# Allegro board 600-INT0061-01_01.brd
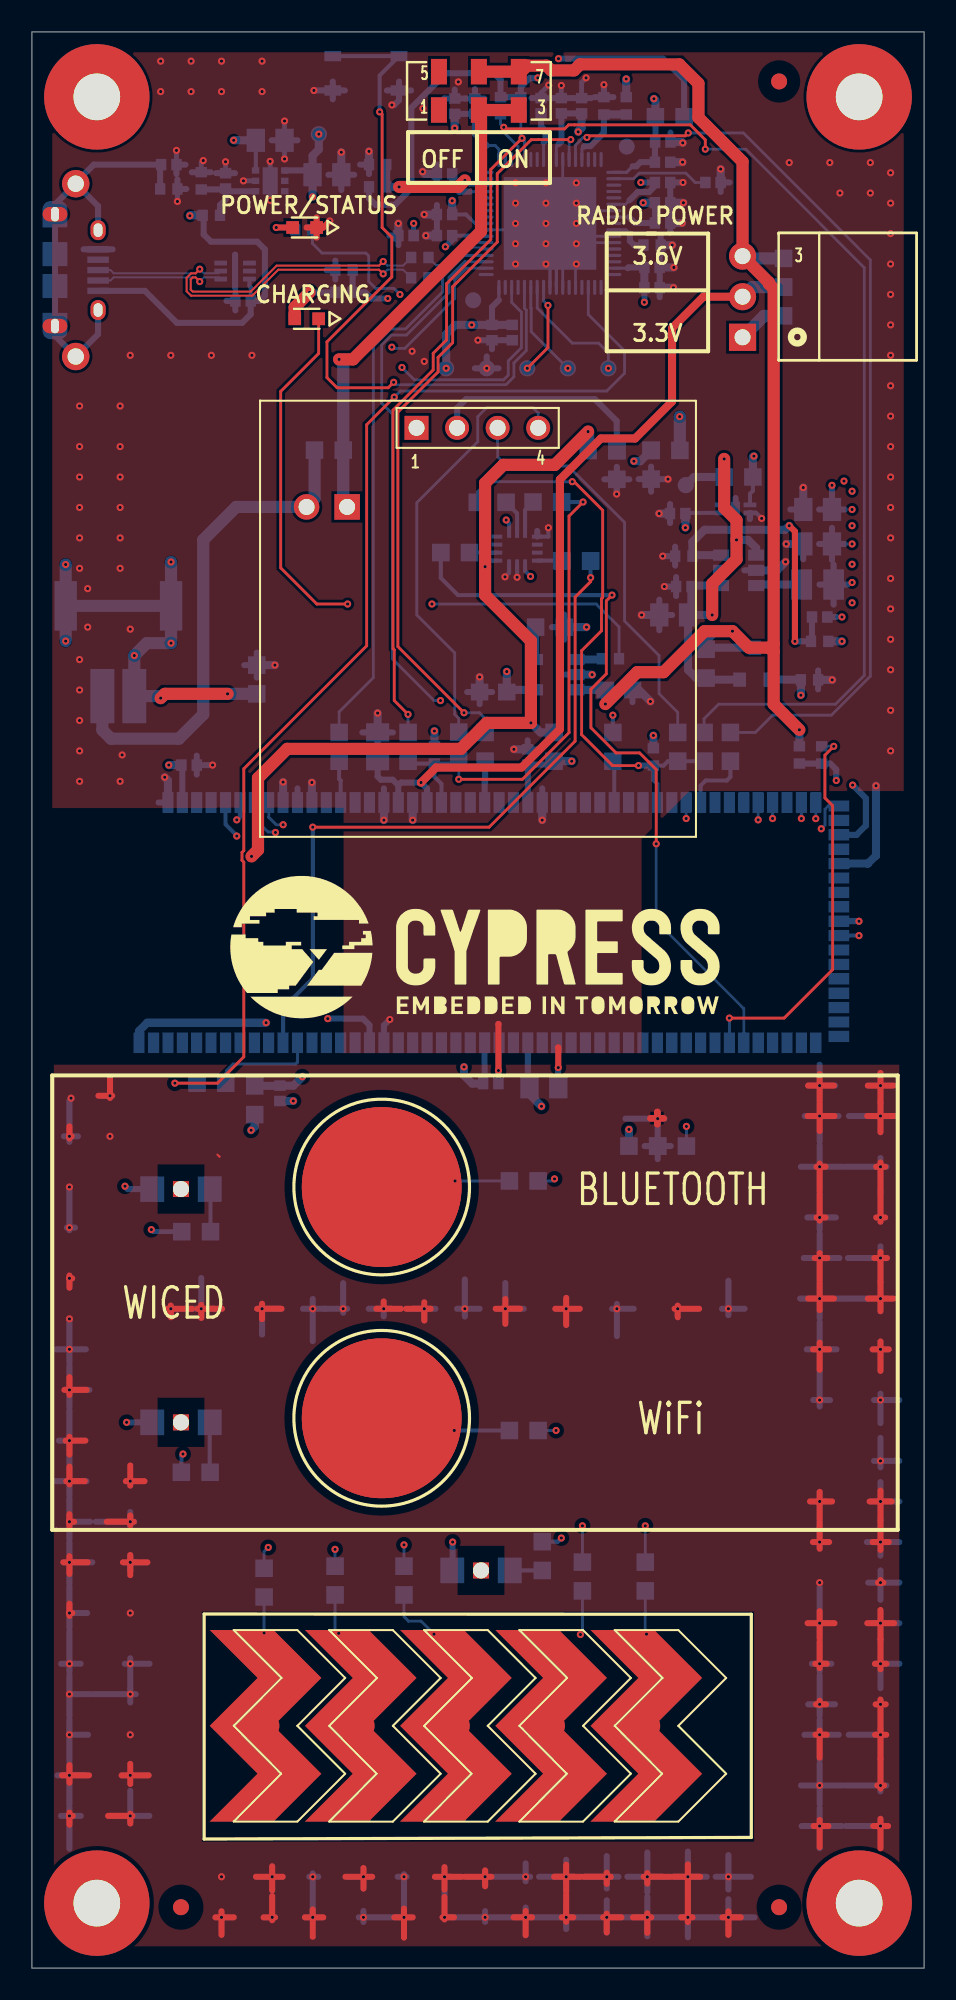
[diagram p0: board, top side]
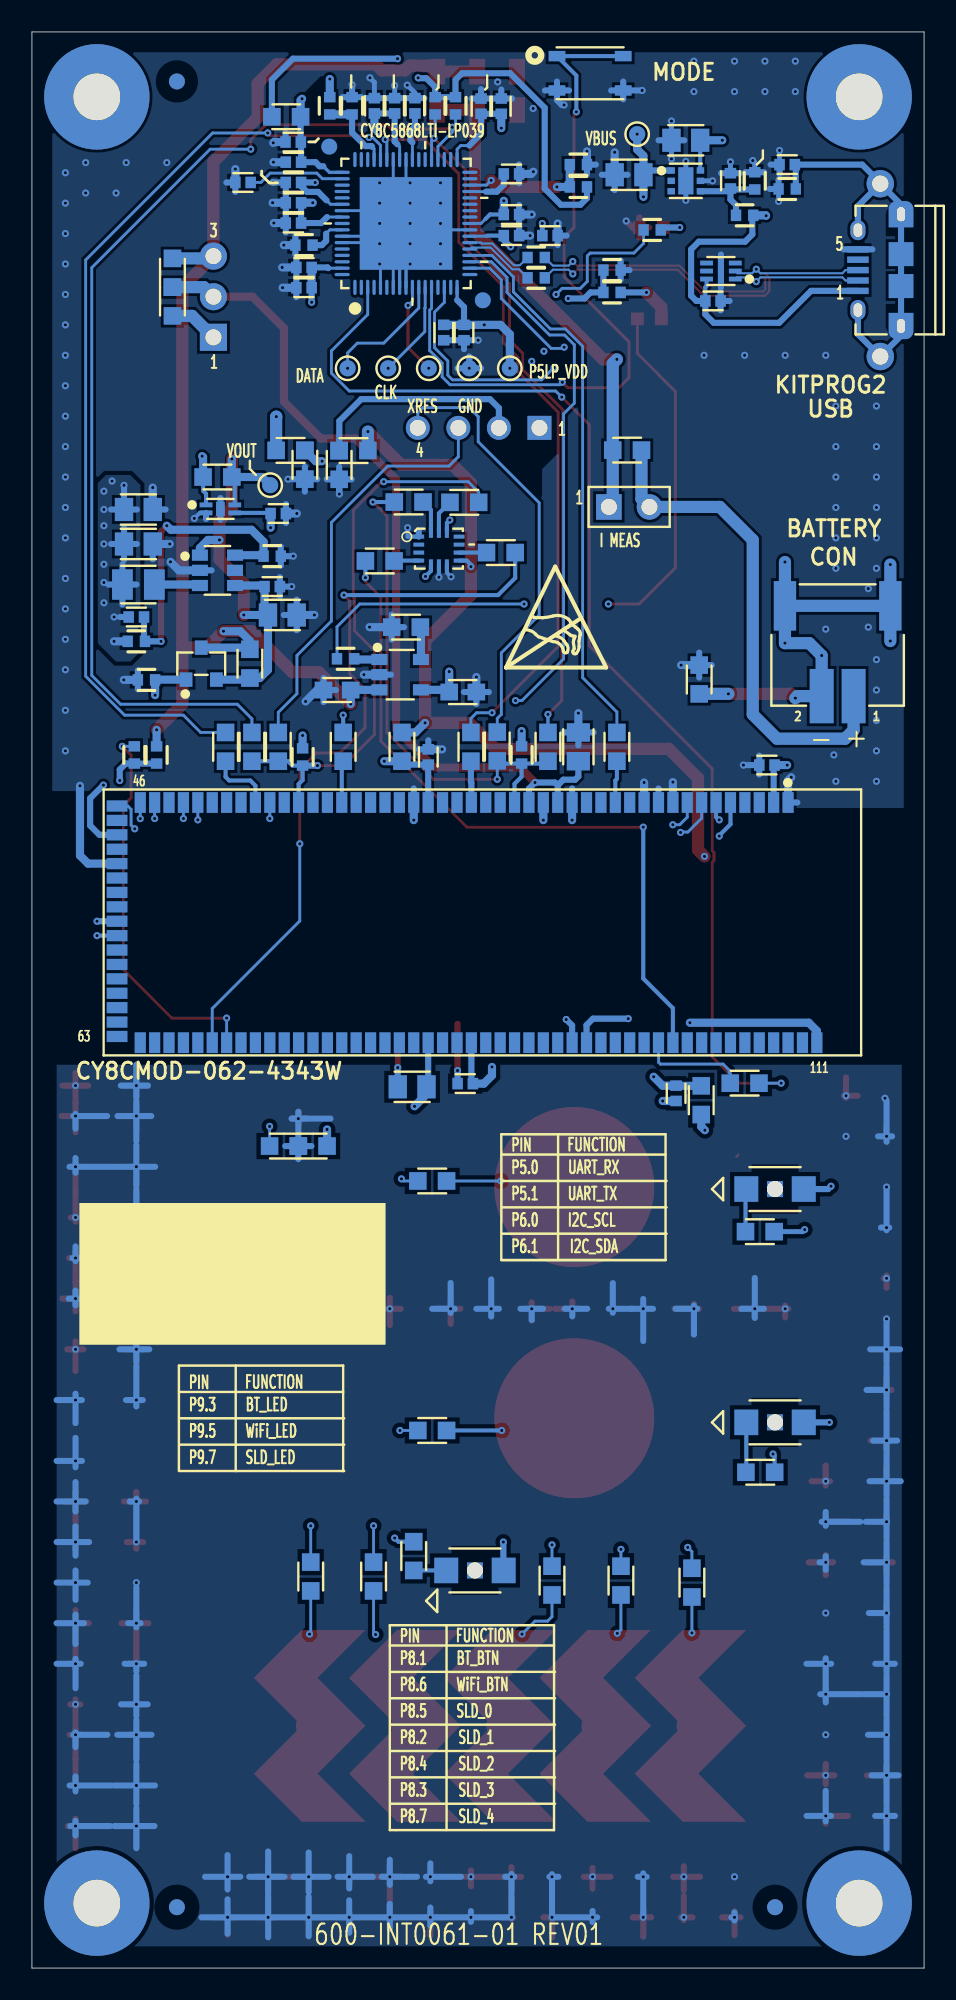
[diagram p1: board, bottom side, seen from below]

Outline 55.88 x 121.21 mm; copper layers: TOP, L02_GND, L03_SIG, BOTTOM. Coordinates in mm from the lower left corner of the outline.
Outline path: 0,121.21 0,0 55.88,0 55.88,121.21 0,121.21

## Design rules (mm)
net group DIFFPAIR0: nets KP_DM KP_DP
net group DP2: nets N17125157 N17125159
net group P6_VDD: nets P6_0 P6_1
net group P8_1: nets N19899805 P8_1
net group P8_6: nets N19899815 P8_6
net group VBUS_IN: nets N19836942 VBUS_IN
net group POWER_PH: nets P5LP_VCCD
net group PWR_PH: nets GND_EARTH1
net group VBUS: nets USB_V_SENSE
net group VTARG: nets I2C_SCL I2C_SDA VTARG_MEAS
nets with their own width: min track width 0.178; nets DISP_SCL DISP_SDA HATCH N17124951 N17125101 N17125106 N17125108 N19186096 N19253849
nets with their own width: min track width 0.381; nets DISP_GND DISP_VDD
nets with their own width: min track width 0.635; nets P5LP_VDD VBUS

## Placement (name value [footprint] x y rotation side)
C1  10nF  [CAPC1005_0402N]  8.57 112.9 0 bottom
C2  0.1uF  [CAPC1005_0402N]  13.22 104.37 180 bottom
C3  1.0 uF  [CAPC1005_0402N]  23.43 108.46 180 bottom
C4  0.1uF  [CAPC1005_0402N]  30.09 102.39 270 bottom
C5  1.0 uF  [CAPC1005_0402N]  25.84 108.46 180 bottom
C6  0.1uF  [CAPC1005_0402N]  34.43 116.59 90 bottom
C7  1.0 uF  [CAPC1005_0402N]  27.75 116.56 90 bottom
C8  0.1uF  [CAPC1005_0402N]  33.16 116.59 90 bottom
C9  1.0 uF  [CAPC1005_0402N]  26.48 116.56 90 bottom
C10  0.1uF  [CAPC1005_0402N]  28.82 102.39 270 bottom
C11  1.0 uF  [CAPC1005_0402N]  42.66 111.79 0 bottom
C12  1.0 uF  [CAPC1005_0402N]  25.84 112.32 180 bottom
C13  1.0 uF  [CAPC1005_0402N]  31.89 116.59 90 bottom
C14  1.0 uF  [CAPC1005_0402N]  39.5 111.79 0 bottom
C15  0.1uF  [CAPC1005_0402N]  25.84 109.78 180 bottom
C16  1.0 uF  [CAPC1005_0402N]  39.5 113.06 0 bottom
C17  0.1uF  [CAPC1005_0402N]  38.84 105.2 0 bottom
C18  1.0 uF  [CAPC1005_0402N]  39.5 110.52 0 bottom
C19  0.1uF  [CAPC1005_0402N]  38.84 106.47 0 bottom
C20  1.0 uF  [CAPC1005_0402N]  39.52 114.32 0 bottom
C21  0.1uF  [CAPC1005_0402N]  39.5 109.25 0 bottom
C22  0.1uF  [CAPC1005_0402N]  40.45 91.06 0 bottom
C23  4.7uF  [CAPC1608_0603M]  28.89 79.88 180 bottom
C24  22uF  [CAPC2012_0805N]  40.2 84.71 180 bottom
C25  22uF  [CAPC2012_0805N]  49.21 89.15 180 bottom
C26  0.1uF  [CAPC1005_0402N]  40.83 86.49 180 bottom
C27  10uF  [CAPC2012_0805N]  14.92 114.43 180 bottom
C28  22uF  [CAPC2012_0805N]  49.21 91.31 180 bottom
C29  22pF  [CAPC1005_0402N]  49.34 84.58 180 bottom
C30  10uF  [CAPC2012_0805N]  32.07 55.17 0 bottom
C31  1.0 uF  [CAPC1005_0402N]  9.84 75.31 0 bottom
C32  1.0 uF  [CAPC1005_0402N]  28.74 55.37 0 bottom
C33  1.0 uF  [CAPC1005_0402N]  31.05 75.82 90 bottom
C34  10uF  [CAPC2012_0805N]  21.65 76.45 90 bottom
C35  1.0 uF  [CAPC1005_0402N]  15.53 54.76 270 bottom
C36  10uF  [CAPC2012_0805N]  18.48 112.27 180 bottom
C37  0.1uF  [CAPC1005_0402N]  12.13 111.89 90 bottom
C38  4.7uF  [CAPC1608_0603M]  36.77 80.01 0 bottom
CAP_SH1  CAP_SHIELD  [CAP_SH1]  39.15 53.21 0 top
CSB1  CapSense  [CSB-10MM]  21.91 48.89 0 top
CSB2  CapSense  [CSB-10MM]  21.91 34.42 0 top
CSS1  CapSense Slider 5 Seg  [CSS5A-300MIL_4MMSHAPE]  26.55 15.16 0 top
J1  HDR2  [3M_961102-6404-AR]  19.74 91.47 180 bottom
J2  10118194-0001LF  [FCI_10118194-0001LF]  4.14 105 90 bottom
J3  620102131822  [WURTH_620102131822]  4.41 79.63 0 bottom
J4  TSW-103-08-F-S-RA  [HARWIN_M20-9960345]  44.51 102.09 90 top
J5  CON 4x1  [CTST254P1X04_W260]  24.09 96.42 0 top
JMP1  USB_Hold  [CON_RA_STIFF_850P]  2.74 100.89 90 top
L1  2.2uH  [INDC2016_0806M]  49.21 86.61 0 bottom
LED1  AMBER LED  [LEDC1608_0603N]  17.08 108.97 0 top
LED2  Red LED  [LED_APTR3216]  9.33 48.77 0 bottom
LED3  Red LED  [LED_APTR3216]  9.33 34.16 0 bottom
LED4  Red LED  [LED_APTR3216]  28.13 24.89 0 bottom
LED5  RED LED  [LEDC1608_0603N]  17.21 103.25 0 top
NOREF  -  [unnamed]  4.06 4.06 0 top
NOREF#2  -  [unnamed]  51.82 4.06 0 top
NOREF#3  -  [#2]  -90.61 -18.34 0 top
NOREF#4  -  [unnamed#2]  9.33 3.81 0 top
NOREF#5  -  [#2]  -108.9 -2.9 0 top
NOREF#6  -  [unnamed]  4.06 117.14 0 top
NOREF#7  -  [#2]  29.78 63.92 0 top
NOREF#8  -  [unnamed#2]  46.8 118.11 0 top
NOREF#9  -  [#2]  63.72 60.25 0 top
NOREF#10  -  [unnamed]  51.82 117.14 0 top
NOREF#11  -  [#2]  45.94 22.15 0 top
NOREF#12  -  [#2]  -365.8 -259 0 top
NOREF#13  -  [unnamed#2]  46.8 3.81 0 top
NOREF#14  -  [#2]  -59.47 -74.37 0 top
NOREF#15  -  [unnamed#2]  46.8 118.11 180 bottom
NOREF#16  -  [unnamed#2]  46.8 3.81 180 bottom
NOREF#17  -  [unnamed#2]  9.33 3.81 180 bottom
Q1  FET-MOS-P  [SOT23_G_S_D-DIODES]  45.28 81.66 180 bottom
R1  100K  [RESC1005_0402M]  8.57 111.38 0 bottom
R2  0ohm  [RESC1608_0603M]  39.95 115.9 0 bottom
R3  15K  [RESC1005_0402M]  19.55 104.9 0 bottom
R4  30K  [RESC1005_0402M]  19.55 106.3 0 bottom
R5  49.9K  [RESC1005_0402M]  37.22 116.59 270 bottom
R6  49.9K  [RESC1005_0402M]  35.83 116.59 270 bottom
R7  15K  [RESC1005_0402M]  21.65 111.51 0 bottom
R8  30K  [RESC1005_0402M]  21.65 112.9 0 bottom
R9  2.2K  [RESC1005_0402M]  17.03 108.81 180 bottom
R10  22E  [RESC1005_0402M]  24.3 105.82 0 bottom
R11  22E  [RESC1005_0402M]  24.3 107.09 0 bottom
R12  4.7K  [RESC1005_0402M]  30.62 116.59 270 bottom
R13  4.7K  [RESC1005_0402M]  29.35 116.59 270 bottom
R14  100K  [RESC1005_0402M]  38.84 107.86 180 bottom
R15  300K  [RESC1005_0402M]  48.07 75.95 270 bottom
R16  4.7K  [RESC1005_0402M]  25.21 75.95 90 bottom
R17  4.7K  [RESC1005_0402M]  38.93 75.82 90 bottom
R18  84.5K  [RESC1005_0402M]  40.83 88.39 180 bottom
R19  383K  [RESC1005_0402M]  49.34 83.06 0 bottom
R20  560ohm  [RESC1608_0603M]  30.81 49.28 180 bottom
R21  100K  [RESC1005_0402M]  49.47 75.95 90 bottom
R22  560ohm  [RESC1608_0603M]  14.54 24.13 270 bottom
R23  560ohm  [RESC1608_0603M]  18.99 24.26 270 bottom
R24  560ohm  [RESC1608_0603M]  23.3 24.26 270 bottom
R25  560ohm  [RESC1608_0603M]  34.48 24.51 270 bottom
R26  560ohm  [RESC1608_0603M]  38.42 24.51 270 bottom
R27  560ohm  [RESC1608_0603M]  30.81 33.66 180 bottom
R28  0ohm  [RESC1608_0603M]  11.24 55.4 180 bottom
R29  0ohm  [RESC1608_0603M]  43.75 76.45 90 bottom
R30  0ohm  [RESC1608_0603M]  28.38 76.45 90 bottom
R31  0ohm  [RESC1608_0603M]  40.09 51.46 180 bottom
R32  0ohm  [RESC1608_0603M]  32.7 76.45 270 bottom
R33  0ohm  [RESC1608_0603M]  44.26 93.34 180 bottom
R34  0ohm  [RESC1608_0603M]  36.39 76.45 90 bottom
R35  0ohm  [RESC1608_0603M]  19.24 76.45 90 bottom
R36  0ohm  [RESC1608_0603M]  38.29 51.46 180 bottom
R37  0ohm  [RESC1608_0603M]  28.8 91.76 0 bottom
R38  15K  [RESC1005_0402M]  11.24 109.73 0 bottom
R39  15K  [RESC1005_0402M]  10.6 111.89 270 bottom
R40  0ohm  [RESC1608_0603M]  23.56 76.45 90 bottom
R41  0ohm  [RESC1608_0603M]  42.1 76.45 90 bottom
R42  0ohm  [RESC1608_0603M]  13.96 54.33 90 bottom
R43  0ohm  [RESC1608_0603M]  47.08 106.13 90 bottom
R44  0ohm  [RESC1608_0603M]  47.08 104.33 90 bottom
R45  0ohm  [RESC1608_0603M]  42.23 81.66 270 bottom
R46  100K  [RESC1005_0402M]  48.7 80.64 180 bottom
R47  0ohm  [RESC1608_0603M]  32.28 91.78 180 bottom
R48  0ohm  [RESC1608_0603M]  34.09 88.09 180 bottom
R49  470ohm  [RESC1608_0603M]  10.29 46.1 0 bottom
R50  470ohm  [RESC1608_0603M]  10.26 31.04 0 bottom
R51  470ohm  [RESC1608_0603M]  31.97 25.79 270 bottom
R52  0ohm  [RESC1608_0603M]  18.6 95.03 180 bottom
R53  0ohm  [RESC1608_0603M]  26.51 88.62 0 bottom
R54  0ohm  [RESC1608_0603M]  14.08 80.67 270 bottom
R55  0ohm  [RESC1608_0603M]  39.68 95.01 180 bottom
R56  0ohm  [RESC1608_0603M]  36.64 94.1 90 bottom
R57  0ohm  [RESC1608_0603M]  38.78 94.11 90 bottom
R58  0ohm  [RESC1608_0603M]  35.74 95 0 bottom
R59  0ohm  [RESC1608_0603M]  40.45 76.45 90 bottom
R60  0ohm  [RESC1608_0603M]  26.73 76.47 90 bottom
R61  4.02K  [RESC1608_0603M]  32.45 83.95 180 bottom
R62  2.2K  [RESC1005_0402M]  36.23 81.97 180 bottom
SW1  JS202011JCQN  [SW_JS202011JCQN]  27.99 117.52 0 top
SW2  SKRPACE010  [SW_SKRPACE010]  20.92 118.62 180 bottom
TP1  TP_SMD  [TP102C]  25.95 100.15 180 bottom
TP2  TP_SMD  [TP102C]  28.49 100.15 180 bottom
TP3  TP_SMD  [TP102C]  31.03 100.15 180 bottom
TP4  TP_SMD  [TP102C]  33.57 100.15 180 bottom
TP5  TP_SMD  [TP102C]  36.11 100.15 180 bottom
TP6  TP_SMD  [TP102C]  17.97 114.81 180 bottom
TP7  TP_SMD  [TP102C]  40.96 92.84 180 bottom
U1  CY8C5868LTI-LP039  [QFN40P800X800X100-69M]  32.45 109.22 90 bottom
U2  PUSBM12VX4-TL,115  [SON50P160X160X50-7M]  12.72 106.24 0 bottom
U3  NCP380HMU05AATBG  [DFN200X200X55-7N]  14.92 111.89 180 bottom
U4  SiP32408  [TDFN50P160X120X60-5M]  44.07 91.35 180 bottom
U5  AP3419KTTR-G1  [SOT95P280X100-6N]  44.26 87.5 180 bottom
U6  BMI160  [BOSCH_BMI160]  30.39 88.86 180 bottom
U7  CY8CMOD-062-4343W  [MOD-CY8C062-43012]  27.52 65.46 180 bottom
U8  MCP73831T-2ATI/OT  [SOT23-5_1_2_3_4_5]  32.82 80.97 180 bottom

## Library data of the parts
C1 C23-C30 C34 C36 C38 = CAP-NP
C2 C22 C37 = CAPACITOR NON-POL
C3 C5 C7 C9 C11-C14 C16 C18 C20 C31-C33 C35 = CAPACITOR NON-POL: signal model: DEFAULT_CAPACITOR_1e+06pF_2_1
C4 C6 C8 C10 C15 C17 C19 C21 = CAPACITOR NON-POL: signal model: DEFAULT_CAPACITOR_100000pF_2_1
CAP_SH1 = CAP_SHIELD: User Part Number: Part No
CSB1 CSB2 = CapSense Button Circle Solid
CSS1 = CapSense Slider 5 Seg EXTEND_1
J1 = HEADER 2_0
J2 = USB MICRO R/A DIP_1
J3 = 620102131822
J4 = M20-9960345
J5 = CON 4x1: User Part Number: Part No
JMP1 = USB_JUMP_0
L1 = IND
LED1 = LED_2
LED2-LED4 = LED Green 0805_3
LED5 = LED_1
NOREF NOREF#2 NOREF#6 NOREF#10 = -: User Part Number: MTGHOLE_D320N
Q1 = FET-MOS-P
R1 R2 R9-R11 R14 R15 R18 R19 R21-R26 R28-R33 R36 R42-R45 R49-R52 R54-R58 R61 R62 = RESISTOR
R3 R7 R38 R39 = RESISTOR: signal model: DEFAULT_RESISTOR_15000OHM_2_1
R4 R8 = RESISTOR: signal model: DEFAULT_RESISTOR_30000OHM_2_1
R5 R6 R46 = RES
R12 R13 R16 R17 = RESISTOR: signal model: DEFAULT_RESISTOR_4700OHM_2_1
R20 R27 = 330 ohm 5% 0805_0: signal model: DEFAULT_RESISTOR_820OHM_2_1
R34 R35 R37 R40 R41 R47 R48 R53 R59 R60 = 330 ohm 5% 0805_0
SW1 = SW_DPDT_JS202011CQN_1
SW2 = SW PUSH NO 4-PIN
TP1-TP7 = TEST_POINT
U1 = CY8C38***-QFN68_0
U2 = PUSBM12VX4-TL,115_0
U3 = NCP380-D_2
U4 = SiP32408_0
U5 = AP3419KTTR-G1
U6 = BMI160
U7 = CY8CMOD-062-43012_3
U8 = MCP73831T-2ATI/OT

## Footprints (pads in the part's own frame, mm; a bottom-side part is the same pattern mirrored in y, then rotated)
3M_961102-6404-AR
  rect 1.6x1.6 hole 1: 1(0,0)
  round 1.6 hole 1: 2(2.54,0)
BOSCH_BMI160
  rect 0.675x0.25 smd: 1(-1.262,0.75) 2(-1.262,0.25) 3(-1.262,-0.25) 4(-1.262,-0.75) 8(1.262,-0.75) 9(1.262,-0.25) 10(1.262,0.25) 11(1.262,0.75)
  rect 0.25x0.675 smd: 5(-0.5,-1.012) 6(0,-1.012) 7(0.5,-1.012) 12(0.5,1.012) 13(0,1.012) 14(-0.5,1.012)
CAP_SH1
  rect 0.3x0.25 smd: 1(0,0)
CAPC1005_0402N
  rect 0.66x0.72 smd: 1(-0.48,0) 2(0.48,0)
CAPC1608_0603M
  rect 1.1x1.05 smd: 1(-0.85,0) 2(0.85,0)
CAPC2012_0805N
  rect 1.15x1.45 smd: 1(-0.9,0) 2(0.9,0)
CON_RA_STIFF_850P
  round 1.72 hole 1.02: 1(0,0) 2(10.82,0)
CSB-10MM
  custom 10x2.5 smd: 1(0,0)
CSS5A-300MIL_4MMSHAPE
  custom 7x11.999 smd: 1(11.925,0) 2(5.961,0) 3(0,0) 4(-5.961,0) 5(-11.925,0)
CTST254P1X04_W260
  rect 1.5x1.5 hole 1: 1(0,0)
  round 1.5 hole 1: 2(2.54,0) 3(5.08,0) 4(7.62,0)
DFN200X200X55-7N
  rect 0.47x0.4 smd: 1(-0.915,0.65) 2(-0.915,0) 3(-0.915,-0.65) 4(0.915,-0.65) 5(0.915,0) 6(0.915,0.65)
  rect 0.95x1.7 smd: H(0,0)
FCI_10118194-0001LF
  rect 0.4x1.35 smd: 1(0,0) 2(0.65,0) 3(1.3,0) 4(1.95,0) 5(2.6,0)
  oval 1.25x0.95 hole 0.85x0.55: SH1(-1.2,0) SH2(3.8,0)
  oval 0.9x1.55 hole 1.15x0.5: SH3(-2.2,-2.7) SH6(4.8,-2.7)
  rect 1.5x1.55 smd: SH4(0.3,-2.7) SH5(2.3,-2.7)
HARWIN_M20-9960345
  rect 1.7x1.7 hole 1: 1(0,0)
  round 1.7 hole 1: 2(2.54,0) 3(5.08,0)
INDC2016_0806M
  rect 1.3x1.9 smd: 1(-1,0) 2(1,0)
LED_APTR3216
  rect 1x1 hole 2.3x2.1 unplated: (0,0)
  rect 1.5x1.6 smd: A(-1.8,0) K(1.8,0)
LEDC1608_0603N
  rect 0.8x0.8 smd: A(-0.75,0) K(0.75,0)
MOD-CY8C062-43012
  rect 0.7x1.3 smd: 1(19.002,7.512) 2(18.1,7.512) 3(17.199,7.512) 4(16.297,7.512) 5(15.395,7.512) 6(14.493,7.512) 7(13.592,7.512) 8(12.69,7.512) 9(11.788,7.512) 10(10.887,7.512) 11(9.985,7.512) 12(9.083,7.512) 13(8.182,7.512) 14(7.28,7.512) 15(6.378,7.512) 16(5.476,7.512) 17(4.575,7.512) 18(3.673,7.512) 19(2.771,7.512) 20(1.87,7.512) 21(0.968,7.512) 22(0.066,7.512) 23(-0.835,7.512) 24(-1.737,7.512) 25(-2.639,7.512) 26(-3.541,7.512) 27(-4.442,7.512) 28(-5.344,7.512) 29(-6.246,7.512) 30(-7.147,7.512) 31(-8.049,7.512) 32(-8.951,7.512) 33(-9.852,7.512) 34(-10.754,7.512) 35(-11.656,7.512) 36(-12.558,7.512) 37(-13.459,7.512) 38(-14.361,7.512) 39(-15.263,7.512) 40(-16.164,7.512) 41(-17.066,7.512) 42(-17.968,7.512) 43(-18.869,7.512) 44(-19.771,7.512) 45(-20.673,7.512) 46(-21.575,7.512) 64(-21.575,-7.525) 65(-20.673,-7.525) 66(-19.771,-7.525) 67(-18.869,-7.525) 68(-17.968,-7.525) 69(-17.066,-7.525) 70(-16.164,-7.525) 71(-15.263,-7.525) 72(-14.361,-7.525) 73(-13.459,-7.525) 74(-12.558,-7.525) 75(-11.656,-7.525) 76(-10.754,-7.525) 77(-9.852,-7.525) 78(-8.951,-7.525) 79(-8.049,-7.525) 80(-7.147,-7.525) 81(-6.246,-7.525) 82(-5.344,-7.525) 83(-4.442,-7.525) 84(-3.541,-7.525) 85(-2.639,-7.525) 86(-1.737,-7.525) 87(-0.835,-7.525) 88(0.066,-7.525) 89(0.968,-7.525) 90(1.87,-7.525) 91(2.771,-7.525) 92(3.673,-7.525) 93(4.575,-7.525) 94(5.476,-7.525) 95(6.378,-7.525) 96(7.28,-7.525) 97(8.182,-7.525) 98(9.083,-7.525) 99(9.985,-7.525) 100(10.887,-7.525) 101(11.788,-7.525) 102(12.69,-7.525) 103(13.592,-7.525) 104(14.493,-7.525) 105(15.395,-7.525) 106(16.297,-7.525) 107(17.199,-7.525) 108(18.1,-7.525) 109(19.002,-7.525) 110(19.904,-7.525) 111(20.805,-7.525)
  rect 1.3x0.7 smd: 47(-23.027,7.293) 48(-23.027,6.391) 49(-23.027,5.489) 50(-23.027,4.588) 51(-23.027,3.686) 52(-23.027,2.784) 53(-23.027,1.883) 54(-23.027,0.981) 55(-23.027,0.079) 56(-23.027,-0.822) 57(-23.027,-1.724) 58(-23.027,-2.626) 59(-23.027,-3.528) 60(-23.027,-4.429) 61(-23.027,-5.331) 62(-23.027,-6.233) 63(-23.027,-7.134)
QFN40P800X800X100-69M
  round 1 smd: (-4.809,-4.809) (4.809,4.809)
  oval 0.95x0.2 smd: 1(-4,3.2) 2(-4,2.8) 3(-4,2.4) 4(-4,2) 5(-4,1.6) 6(-4,1.2) 7(-4,0.8) 8(-4,0.4) 9(-4,0) 10(-4,-0.4) 11(-4,-0.8) 12(-4,-1.2) 13(-4,-1.6) 14(-4,-2) 15(-4,-2.4) 16(-4,-2.8) 17(-4,-3.2) 35(4,-3.2) 36(4,-2.8) 37(4,-2.4) 38(4,-2) 39(4,-1.6) 40(4,-1.2) 41(4,-0.8) 42(4,-0.4) 43(4,0) 44(4,0.4) 45(4,0.8) 46(4,1.2) 47(4,1.6) 48(4,2) 49(4,2.4) 50(4,2.8) 51(4,3.2)
  oval 0.2x0.95 smd: 18(-3.2,-4) 19(-2.8,-4) 20(-2.4,-4) 21(-2,-4) 22(-1.6,-4) 23(-1.2,-4) 24(-0.8,-4) 25(-0.4,-4) 26(0,-4) 27(0.4,-4) 28(0.8,-4) 29(1.2,-4) 30(1.6,-4) 31(2,-4) 32(2.4,-4) 33(2.8,-4) 34(3.2,-4) 52(3.2,4) 53(2.8,4) 54(2.4,4) 55(2,4) 56(1.6,4) 57(1.2,4) 58(0.8,4) 59(0.4,4) 60(0,4) 61(-0.4,4) 62(-0.8,4) 63(-1.2,4) 64(-1.6,4) 65(-2,4) 66(-2.4,4) 67(-2.8,4) 68(-3.2,4)
  rect 5.8x5.8 smd: H(0,0)
RESC1005_0402M
  rect 0.65x0.72 smd: 1(-0.54,0) 2(0.54,0)
RESC1608_0603M
  rect 1.1x1.1 smd: 1(-0.9,0) 2(0.9,0)
SON50P160X160X50-7M
  rect 0.8x0.3 smd: 1(-0.9,0.5) 2(-0.9,0) 3(-0.9,-0.5) 4(0.9,-0.5) 5(0.9,0) 6(0.9,0.5)
  rect 0.3x1.6 smd: 7(0,0)
SOT23-5_1_2_3_4_5
  rect 1x0.7 smd: 1(-1.3,0.95) 2(-1.3,0) 3(-1.3,-0.95) 4(1.3,-0.95) 5(1.3,0.95)
SOT23_G_S_D-DIODES
  rect 0.8x0.899 smd: D(0,1) G(-0.95,-1) S(0.95,-1)
SOT95P280X100-6N
  rect 1x0.7 smd: 1(-1.1,0.95) 2(-1.1,0) 3(-1.1,-0.95) 4(1.1,-0.95) 5(1.1,0) 6(1.1,0.95)
SW_JS202011JCQN
  rect 1x1.6 smd: 1(-2.5,-1.2) 2(0,-1.2) 3(2.5,-1.2) 5(-2.5,1.2) 6(0,1.2) 7(2.5,1.2)
SW_SKRPACE010
  rect 1.05x0.65 smd: 1(-2.075,1.075) 2(2.075,1.075) 3(-2.075,-1.075) 4(2.075,-1.075)
TDFN50P160X120X60-5M
  rect 0.8x0.3 smd: 1(-0.9,0.25) 2(-0.9,-0.25) 3(0.9,-0.25) 4(0.9,0.25)
  rect 0.55x0.9 smd: H(0,0)
TP102C
  round 1.016 smd: 1(0,0)
unnamed
  round 6.604 hole 2.921 unplated: (0,0)
unnamed#2
  round 1 smd: (0,0)
WURTH_620102131822
  rect 1.5x3.4 smd: 1(0,0) 2(2,0)
  rect 1.4x3.1 smd: H1(-2.3,-5.65) H2(4.3,-5.65)

## Nets
GND: C1.2 C2.2 C3.2 C4.2 C5.2 C6.2 C7.2 C8.2 C9.2 C10.2 C11.2 C12.2 C13.2 C14.2 C15.2 C16.2 C17.2 C18.2 C19.2 C20.2 C21.2 C22.1 C23.2 C24.2 C25.2 C26.2 C27.1 C28.2 C30.2 C31.2 C32.2 C33.2 C34.2 C35.2 C36.1 C37.2 C38.2 J2.5(GND) LED1.K(CATHODE) R1.2 R4.1 R6.1 R8.1 R14.1 R18.2 R36.2 R39.1 R46.1 R54.1 R56.1 R57.1 R61.1 SW2.3 SW2.4 TP2.1 U1.5(VSSB) U1.7(VBOOST) U1.8(VBAT) U1.9(VSSD#9) U1.25(VSSD#25) U1.43(VSSA) U1.45(VSSD#45) U1.58(VSSD#58) U1.62(P2[0]) U1.63(P2[1]) U1.H(EPAD) U2.7 U3.5(GND) U3.H(PAD) U4.2(GND) U4.H(PAD) U5.2(GND) U6.1(SDO) U6.6(GNDIO) U6.7(GND) U7.1(GND1) U7.9(GND2) U7.10(GND3) U7.11(GND4) U7.16(GND5) U7.18(GND6) U7.27(GND7) U7.51(GND8) U7.94(GND9) U7.111(GND10) U8.2(VSS)
GND_EARTH1: C1.1 J2.SH1(S1) J2.SH2(S2) J2.SH3(S3) J2.SH4(S4) J2.SH5(S5) J2.SH6(S6) JMP1.1 JMP1.2 R1.1
VBAT: C38.1 J4.3 Q1.D R15.1 R43.2 R45.1 SW1.6 SW1.7 U8.3(VBAT)
VBAT_1DX: C34.1 J4.2 R43.1 R44.2 U7.17(VBAT1) U7.19(VBAT2)
VBAT_MINUS: J3.2 J3.H1(SH1) J3.H2(SH2) R54.2
VBAT_PLUS: J1.2 J3.1 R52.2
VBUS: C22.2 C23.1 C36.2 LED5.A(ANODE) Q1.G R2.2 R3.1 R33.1 R46.2 TP6.1 U3.1(OUT) U4.1(IN) U4.3(EN) U8.4(VDD)
VBUS_IN: C2.1 C27.2 J2.1(VBUS) R38.1 U2.6 U3.6(IN)
VDDA: U7.50(VDDA)
VDDD: U7.52(VDDD)
DISP_GND: J5.2 R56.2 R58.2
DISP_SCL: J5.3 R59.2
DISP_SDA: J5.4 R60.2
DISP_VDD: J5.1 R55.2 R57.2
HATCH: CAP_SH1.1(SH) R31.2 R36.1
I2C_SCL: R13.2 R41.2 U1.38(P12[0])
I2C_SDA: R12.2 R40.2 U1.39(P12[1])
KP_DM: J2.2(DM) R11.1 U2.1
KP_DP: J2.3(DP) R10.1 U2.2
P0_4: R48.1 U7.101(P0_4)
P5_0: R34.1 U7.32(P5_0)
P5_1: R35.1 U7.13(P5_1)
P5LP1_2: SW2.1 SW2.2 U1.13(P1[2])
P5LP1_4: R9.1 U1.15(P1[4])
P5LP2_2: U1.64(P2[2])
P5LP2_3: U1.65(P2[3])
P5LP2_4: U1.66(P2[4])
P5LP_SIO_VREF: R5.2 R6.2 U1.48(P0[0])
P5LP_VCCD: C14.1 C15.1 U1.26(VCCD#26) U1.57(VCCD#57)
P5LP_VDD: C3.1 C4.1 C5.1 C6.1 C7.1 C8.1 C9.1 C10.1 C16.1 C17.1 C18.1 C19.1 C20.1 C21.1 R2.1 TP1.1 U1.17(VDDIO1) U1.24(VDDD#24) U1.35(VDDIO3) U1.44(VDDA) U1.52(VDDIO) U1.59(VDDD#59) U1.67(VDDIO2)
P6_0: R17.1 R37.1 R41.1 R59.1 U7.35(P6_0)
P6_1: R16.1 R40.1 R47.1 R60.1 U7.20(P6_1)
P6_3: R31.1 U7.37(P6_3)
P6_6: R30.1 U7.23(P6_6)
P6_7: R29.1 U7.38(P6_7)
P6_VDD: C30.1 C31.1 C32.1 C33.1 LED2.A LED3.A LED4.A R16.2 R17.2 R32.2 U6.5(VDDIO) U6.12(CSB) U7.2(VDDIO2) U7.26(VDDUSB) U7.49(VCC_VAR) U7.84(VDDIO0) U7.87(VBACKUP)
P8_1: R20.1 U7.42(P8_1)
P8_2: R23.1 U7.8(P8_2)
P8_3: R25.1 U7.46(P8_3)
P8_4: R24.1 U7.45(P8_4)
P8_5: R22.1 U7.7(P8_5)
P8_6: R27.1 U7.43(P8_6)
P8_7: R26.1 U7.47(P8_7)
P9_3: R49.1 U7.6(P9_3)
P9_5: R50.1 U7.5(P9_5)
P9_7: R51.1 U7.56(P9_7)
P10_0: R15.2 R21.1 U7.55(P10_0)
P10_1: R21.2 U7.70(P10_1)
P10_2: R53.1 U7.69(P10_2)
RESET: R28.2 U1.3(P12[4])
SWDCLK: R29.2 U1.47(P12[3])
SWDIO: R30.2 U1.46(P12[2])
UART_RX: R35.2 U1.21(P12[7])
UART_TX: R34.2 U1.20(P12[6])
USB_V_SENSE: R3.2 R4.2 U1.19(P1[7])
VIO_1DX: C35.1 R42.2 U7.95(VDDIO_1LV)
VOUT: C24.1 C26.1 Q1.S R33.2 R45.2 TP7.1 U4.4(OUT) U5.1(EN) U5.4(VIN)
VREF: U7.57(VREF)
VTARG: C25.1 C28.1 C29.1 J4.1 L1.2 R5.1 R7.1 R12.1 R13.1 R19.2 R32.1 R42.1 R44.1 R55.1 R58.1 U6.8(VDD)
VTARG_MEAS: R7.2 R8.2 U1.32(P3[3])
XRES: R28.1 U7.100(XRES_L)
N17124951: R14.2 U1.61(P15[5])
N17125101: C12.1 U1.31(P3[2])
N17125106: C11.1 U1.53(P0[4])
N17125108: C13.1 U1.42(VCCA)
N17125157: R10.2 U1.22(P15[6] D+)
N17125159: R11.2 U1.23(P15[7] D-)
N19186096: LED1.A(ANODE) R9.2
N19253849: TP3.1 U1.10(X\R\E\S\)
N19328633: TP5.1 U1.11(P1[0])
N19328636: TP4.1 U1.12(P1[1])
N19347721: C29.2 R18.1 R19.1 U5.6(FB)
N19669338: L1.1 U5.3(LX)
N19836942: C37.1 R38.2 R39.2 U3.4(EN)
N19899464: CSS1.1 R26.2
N19899466: CSS1.2 R25.2
N19899468: CSS1.3 R24.2
N19899470: CSS1.4 R23.2
N19899472: CSS1.5 R22.2
N19899805: CSB1.1 R20.2
N19899815: CSB2.1 R27.2
N19906515: LED2.K R49.2
N19906555: LED3.K R50.2
N19906595: LED4.K R51.2
N19907528: J1.1 R52.1 SW1.2 SW1.3
N19917732: R61.2 U8.5(PROG)
N19917977: LED5.K(CATHODE) R62.1
N19917979: R62.2 U8.1(STAT)
N19933983: R37.2 U6.13(SCX)
N19933986: R47.2 U6.14(SDX)
N19934142: R48.2 U6.4(INT1)
N19935330: R53.2 U6.9(INT2)

Pads without a net: J2 4; SW1 1 5; U1 1 2 4 6 14 16 18 27 28 29 30 33 34 36 37 40 41 49 50 51 54 55 56 60 68; U2 3 4 5; U3 2 3; U5 5; U6 2 3 10 11; U7 3 4 12 14 15 21 22 24 25 28 29 30 31 33 34 36 39 40 41 44 48 53 54 58 59 60 61 62 63 64 65 66 67 68 71 72 73 74 75 76 77 78 79 80 81 82 83 85 86 88 89 90 91 92 93 96 97 98 99 102 103 104 105 106 107 108 109 110

## Via types
v1: diameter 0.45, hole 0.2, TOP to BOTTOM, 393 vias

## Routing (per net, layer and track width the routed paths; a pad name or vN(x,y) marks a point on that pad's centre or on a via; arc(x,y) is an arc through that point)
GND: length 208.6
  TOP w0.381: 17.83,108.33 LED1.K ; LED1.K 18.25,108.97 v1(18.66,109.37) ; LED1.K 17.2,108.97 ; LED1.K 17.83,109.6 ; 32.96,57.63 32.97,57.62 v1(32.97,56.37) ; 29.22,59.11 29.22,59.1 v1(29.22,56.19)
  L02_GND w0.381: 37.4,57.58 37.39,57.57 v1(37.39,52.5) ; 20.08,57.63 20.05,57.61
  L02_GND w0.508: v1(14.67,59.18) 15.81,60.32 19.75,60.32 ; v1(16.37,54.28) 17.92,54.28 20.05,56.41 20.05,57.61
  BOTTOM w0.178: v1(34.1,110.49) 34.57,110.02 U1.58 ; U1.43 32.45,112.01 v1(32.19,111.76) ; U1.63 34.17,108.02 v1(34.1,107.95) 33.25,107.1 U1.7 ; v1(30.29,109.22) 29.89,108.82 U1.25 ; v1(34.1,111.76) 34.07,111.73 33.57,111.73 33.25,112.05 U1.45 ; v1(34.1,106.68) 34.05,106.63 U1.5 ; U1.62 34.9,108.42 v1(34.1,109.22)
  BOTTOM w0.203: v1(32.19,107.95) 32.85,107.3 U1.8 ; U1.9 32.45,106.43 v1(32.19,106.68)
  BOTTOM w0.254: U4.2 45.36,91.1 v1(45.71,90.75) ; U6.6 v1(30.39,87.07) ; U6.7 29.89,87.36 v1(29.63,87.1) ; v1(32.35,90.17) 32.35,89.61 U6.1
  BOTTOM w0.305: v1(14.92,110.67) U3.H v1(14.92,113.11) ; C8.2 v1(33.16,117.86) ; v1(34.71,118.34) 34.43,118.06 C6.2 ; R1.2 v1(9.11,110.6) ; C13.2 31.89,117.4 v1(32.37,117.88) ; v1(10.73,113.16) 10.6,113.03 R39.1 ; U3.5 v1(13.25,111.89) ; v1(15.82,115.63) C27.1 v1(15.82,113.26) ; C1.2 v1(9.05,113.79) ; C37.2 v1(12.13,113.08)
  BOTTOM w0.381: 44.07,92.03 U4.H 44.07,90.67 ; v1(22.55,116.64) 22.69,116.64 22.99,116.94 SW2.3 ; 20.56,112.9 R8.1 21.11,112.31 ; v1(40.78,111.79) C14.2 39.98,111.19 ; 10.01,112.43 R39.1 11.2,112.43 ; 21.65,76.55 C34.2 ; C34.2 20.7,77.35 ; C34.2 22.61,77.35 ; 9.05,112.31 C1.2 9.61,112.9 ; 32.57,117.07 C8.2 33.75,117.07 ; 39.3,83.75 C24.2 ; C24.2 39.3,85.67 ; C24.2 40.1,84.71 ; v1(28.49,100.15) 29.23,100.15 ; v1(28.49,100.15) 28.49,100.89 ; v1(28.49,100.15) 27.75,100.15 ; 19.38,111.31 C36.1 ; C36.1 20.19,112.27 ; C36.1 18.57,112.27 ; 10.32,74.72 C31.2 ; C31.2 10.32,75.9 ; C31.2 v1(11.32,75.31) ; 5.05,107.6 J2.5 3.24,107.6 ; SW2.4 v1(17.66,117.55) ; SW2.4 18.84,116.99 ; SW2.4 18.84,118.1 ; SW2.4 19.6,117.55 ; 29.49,101.91 C4.2 ; 36.83,80.01 C38.2 ; C38.2 37.62,79.25 ; C38.2 37.62,80.77 ; 35.85,93.2 R56.1 ; R56.1 37.42,93.2 ; R56.1 36.64,93.98 ; R56.1 36.64,92.42 ; R56.1 v1(36.62,92.28) ; C10.2 29.41,101.91 ; C10.2 28.82,101.35 ; C10.2 v1(27.93,101.91) ; 49.24,81.24 R46.1 49.24,80.05 ; 39.98,111.11 C18.2 39.98,109.92 ; C23.2 28.82,79.88 ; C23.2 27.26,79.88 ; C23.2 28.04,79.13 ; C20.2 40,114.91 ; 33.38,80.97 U8.2 ; 22.39,108.46 C3.2 22.95,107.87 ; v1(22.42,59.39) 22.04,59.01 U7.94 ; 7.94,72.97 U7.1 ; 11.54,112.37 C37.2 12.72,112.37 ; 32.48,117.07 C13.2 31.3,117.07 ; R57.1 38.78,93.99 ; R57.1 38.78,92.43 ; R57.1 v1(39.84,93.21) ; R57.1 38,93.21 ; C30.2 v1(32.97,56.37) ; 13.3,81.57 R54.1 ; R54.1 14.08,80.79 ; R54.1 14.08,82.35 ; 39.38,108.45 R14.1 39.38,107.27 ; SW2.3 23.75,117.55 ; SW2.3 22.24,117.55 ; SW2.3 22.99,118.1 ; U6.1 31.65,89.97 ; 18.45,106.3 R4.1 ; R4.1 19.01,105.71 ; R4.1 19.01,106.89 ; R18.2 40.29,88.98 ; R18.2 v1(39.51,88.39) ; R18.2 40.29,87.8 ; 12.72,105.21 U2.7 12.72,107.27 ; R6.1 v1(35.83,117.91) ; R6.1 36.42,117.13 ; R6.1 35.23,117.13 ; C9.2 25.82,117.04 25.82,117.04 ; C9.2 26.48,117.6 ; C9.2 27.07,117.04 ; 39.97,91.65 C22.1 39.97,90.47 ; 31.64,76.3 C33.2 31.05,76.86 ; C26.2 40.35,87.08 ; C26.2 40.35,85.9 ; C26.2 v1(39.61,86.49) ; R61.1 33.35,84.73 ; R61.1 32.57,83.95 ; R61.1 33.35,83.17 ; 16.63,114.43 C27.1 15.02,114.43 ; 39.98,108.65 C21.2 39.98,109.84 ; 25.36,112.91 C12.2 25.36,111.73 ; 44.63,87.5 U5.2 ; 9.67,111.38 R1.2 9.11,111.97 ; 39.32,104.6 C17.2 39.32,105.79 ; C2.2 12.74,104.96 ; C2.2 12.18,104.37 ; C2.2 12.74,103.78 ; 25.36,110.37 C15.2 25.36,109.19 ; C7.2 27.75,117.63 ; C7.2 27.16,117.04 ; C7.2 28.34,117.04 ; 39.32,107.06 C19.2 39.32,105.87 ; C32.2 v1(29.22,56.19) ; 47.51,91.31 C28.2 ; U7.10 16.63,73.85 ; 48.31,88.2 C25.2 ; 33.84,117.07 C6.2 35.02,117.07 ; 43.14,111.19 C11.2 43.7,111.79 ; U7.27 31.96,73.85 ; 44.97,90.72 U4.2 ; C5.2 25.36,109.05 ; U7.16 22.04,73.85
  BOTTOM w0.508: C5.2 v1(24.68,108.46) ; U7.111 6.72,58.67 7.22,59.18 v1(14.67,59.18) ; C22.1 v1(39.29,91.06) ; U5.2 46.67,87.5 v1(47.21,88.04) ; C12.2 24.61,112.32 v1(24.47,112.46) ; v1(40.76,114.27) 40.71,114.32 C20.2 ; C16.2 v1(40.75,113.06) ; U7.11 v1(17.54,74.22) ; v1(38.74,79.3) 38.02,80.01 C38.2 ; C19.2 v1(40.21,106.47) ; C25.2 v1(47.25,89.15) ; C3.2 v1(22.95,109.22) ; C28.2 v1(48.31,92.68) ; C33.2 v1(30.19,76.3) ; U7.16 v1(22.04,71.87) ; U7.1 8.52,74.35 v1(8.32,74.55) ; C21.2 v1(40.73,109.25) ; U7.27 v1(31.96,71.87) ; U7.18 v1(23.85,71.87) ; C36.1 v1(19.38,113.68) ; C34.2 v1(21.65,78.56) ; R36.2 v1(37.39,52.5) ; R14.1 v1(40.1,107.86) ; C35.2 v1(16.37,54.28) ; R54.1 v1(15.22,81.57) ; C18.2 v1(40.81,110.52) ; U8.2 v1(35.09,80.97) ; v1(52.87,74.02) 52.87,69.65 52.36,69.14 U7.51 ; C23.2 v1(28.04,80.82) ; U7.9 v1(15.73,74.25) ; C11.2 v1(43.14,112.62) ; R61.1 v1(34.73,83.95) ; C17.2 v1(40.18,105.2) ; C15.2 v1(24.57,109.78) ; R8.1 v1(21.11,113.73) ; R46.1 v1(50.13,80.64) ; C24.2 v1(38.19,84.71)
  vias: v1(2.98,97.79) v1(2.98,95.25) v1(2.98,93.34) v1(2.98,91.44) v1(2.98,89.53) v1(2.98,87.63) v1(2.98,81.91) v1(2.98,80.01) v1(2.98,78.11) v1(2.98,76.2) v1(2.98,74.3) v1(3.49,86.36) v1(3.49,83.95) v1(5.52,97.79) v1(5.52,95.25) v1(5.52,93.34) v1(5.52,91.44) v1(5.52,89.53) v1(5.52,87.63) v1(5.52,74.3) v1(5.65,75.95) v1(6.16,100.97) v1(6.16,83.82) v1(8.06,119.38) v1(8.06,117.47) v1(8.7,100.97) v1(9.97,119.38) v1(9.97,117.47) v1(11.24,100.97) v1(11.87,119.38) v1(11.87,117.47) v1(13.78,100.97) v1(14.41,119.38) v1(14.41,117.47) v1(23.81,101.22) v1(24.49,116.42) v1(24.57,100.58) v1(26.71,118.08) v1(30.29,111.76) v1(30.29,110.49) v1(30.29,107.95) v1(30.29,106.68) v1(32.19,110.49) v1(32.19,109.22) v1(47.43,113.03) v1(49.97,113.03) v1(50.61,111.12) v1(52.51,113.03) v1(52.51,111.12) v1(53.78,112.39) v1(53.78,110.49) v1(53.78,108.58) v1(53.78,106.68) v1(53.78,104.78) v1(53.78,102.87) v1(53.78,100.97) v1(53.78,99.06) v1(53.78,97.16) v1(53.78,95.25) v1(53.78,93.34) v1(53.78,91.44) v1(53.78,89.53) v1(53.78,87) v1(53.78,85.09) v1(53.78,83.19) v1(53.78,81.28) v1(53.78,78.74) v1(53.78,76.2)
GND_EARTH1: length 26.3
  BOTTOM w0.381: J2.SH2 4.14,110.31 JMP1.2 ; R1.1 8.03,112.84 C1.1 3.87,112.9 2.74,111.77 JMP1.2 ; JMP1.2 1.44,110.41 J2.SH6 J2.SH5 J2.SH4 J2.SH3 1.44,102.19 JMP1.1 4.14,102.29 J2.SH1
VBAT: length 82.9
  TOP w0.762: 46.46,82.41 46.46,79.13 v1(48.07,77.52) ; 46.46,82.41 46.46,82.91 ; 46.46,82.41 46.21,82.66 ; v1(35.92,79.13) 37.91,81.13 39.56,81.13 42.13,83.69 v1(43.88,83.69) 44.91,82.66 46.21,82.66 ; 46.46,82.91 46.46,105.14 46.16,105.44 46.16,105.52 J4.3 44.51,113.08 41.74,115.85 41.74,117.98 40.55,119.18 34.33,119.18 33.95,118.8 32.52,118.8 32.22,119.1 31.03,119.1 30.65,118.72 SW1.7 SW1.6 ; 46.46,82.91 46.21,82.66
  BOTTOM w0.508: v1(43.88,83.69) 42.84,83.69 42.23,83.08 R45.1 42.33,82.66 Q1.D ; v1(35.92,79.13) C38.1 35.91,80.02 U8.3 ; R15.1 v1(48.07,77.52)
  BOTTOM w0.762: J4.3 44.65,107.03 R43.2
VBAT_1DX: length 53.9
  TOP w0.508: v1(24.37,74.22) 24.37,74.22 25.31,75.16 30.67,75.16 33.07,77.56 33.07,93.19 35.64,95.76 37.78,95.76 40.09,98.07 40.09,102.67 42.06,104.63 J4.2
  BOTTOM w0.381: U7.19 24.75,73.84 v1(24.37,74.22) 23.12,74.22 22.95,74.04 ; 22.95,74.04 22.59,74.4 21.86,74.4 21.65,74.6 C34.1 ; 22.95,74.04 U7.17
  BOTTOM w0.762: J4.2 45.11,105.23 R43.1
VBAT_MINUS: length 29.5
  TOP w0.762: v1(8.06,79.5) 8.33,79.77 v1(12.26,79.77)
  BOTTOM w0.762: v1(8.06,79.5) 7.94,79.63 J3.2 v1(6.41,82.17) 7.19,82.94 v1(8.71,82.94) J3.H2 ; J3.H2 J3.H1 ; J3.H2 v1(8.71,88.02) ; J3.H1 v1(2.11,83.08) ; J3.H1 v1(2.11,87.87) ; v1(12.26,79.77) R54.2
VBAT_PLUS: length 31.3
  BOTTOM w0.762: J3.1 4.41,77.5 4.95,76.96 9.21,76.96 10.73,78.49 10.73,89.41 12.8,91.47 J1.2 17.7,91.97 R52.2
VBUS: length 50.2
  TOP w0.762: v1(17.39,104.9) 16.46,103.97 LED5.A
  L03_SIG w0.762: v1(17.97,114.81) 17.97,115.75 21.76,119.53 v1(32.98,119.53)
  BOTTOM w0.254: U4.1 44.97,92.3 45.16,92.48 R33.1 ; C22.2 40.97,91.1 U4.3
  BOTTOM w0.381: R2.2 40.85,118.22 39.53,119.53 v1(32.98,119.53) ; U3.1 17.31,112.54 C36.2 ; R3.1 v1(17.39,104.9)
  BOTTOM w0.508: v1(29.74,81.16) C23.1 29.88,80.02 U8.4 ; v1(17.97,114.81) 17.97,113.85 17.58,113.46 C36.2 v1(17.58,110.89) ; v1(45.22,94.65) 45.16,94.59 R33.1 ; Q1.G 48.15,80.66 R46.2 v1(48.16,79.69) ; C22.2 v1(40.93,90.17)
VBUS_IN: length 33.2
  L03_SIG w0.762: v1(9.89,109.7) 9.89,113.41 10.91,114.43 v1(12.64,114.43)
  BOTTOM w0.254: C27.2 14.02,112.55 U3.6 ; U2.6 13.62,105.31 13.7,105.23 C2.1
  BOTTOM w0.381: J2.1 7.08,105 9.08,103 13.17,103 13.7,103.53 C2.1 14.26,104.37 14.59,104.7 14.59,107.59 14.11,108.08 11.21,108.08 10.76,108.53 10.76,109.67 R38.1
  BOTTOM w0.508: R38.1 9.92,109.73 v1(9.89,109.7) ; C27.2 v1(12.64,114.43)
DISP_GND: length 13.9
  BOTTOM w0.381: J5.2 26.63,97.66 27.19,98.22 35.25,98.22 36.62,96.85 R56.2
DISP_SCL: length 26
  BOTTOM w0.178: R59.2 40.45,78.61 39.28,79.78 39.28,82.17 37.12,84.33 37.12,90.5 33.59,94.03 29.76,94.03 29.17,94.62 J5.3
DISP_SDA: length 27.5
  BOTTOM w0.178: J5.4 31.71,97.36 31.38,97.69 28.49,97.69 27.93,97.13 27.93,95.55 24.11,91.74 24.11,84.71 26.48,82.34 26.48,78.49 26.73,78.23 R60.2
DISP_VDD: length 16.4
  L03_SIG w0.762: J5.1 24.09,95.48 25.23,94.34 v1(37.71,94.34)
  BOTTOM w0.508: v1(37.71,94.34) 38.11,94.34 R55.2
HATCH: length 477.2
  TOP w0.127: 11.62,50.93 11.75,50.8 11.76,50.8
  TOP w0.381: v1(22.03,41.27) 23.11,41.27 ; v1(22.03,41.27) 22.03,41.73 ; v1(22.03,41.27) 21.58,41.27 ; v1(2.35,22.22) 2.35,22.81 ; v1(2.35,22.22) 2.53,22.22 ; v1(2.35,22.22) 2.35,22.05 ; v1(20.76,5.72) 20.76,6.26 ; v1(20.76,5.72) 20.76,4.97 ; v1(20.76,5.72) 21.31,5.72 ; v1(20.76,5.72) 19.64,5.72 ; 17.1,3.17 v1(17.59,3.17) ; v1(17.59,3.17) 17.59,1.96 ; v1(17.59,3.17) 18.25,3.17 ; v1(17.59,3.17) 17.59,3.67 ; 48.74,29.21 v1(49.34,29.21) ; v1(49.34,29.21) 49.34,29.81 ; v1(49.34,29.21) 50.12,29.21 ; v1(49.34,29.21) 49.34,28.12 ; v1(49.34,38.73) 49.93,38.73 ; v1(49.34,38.73) 49.34,39.15 ; v1(49.34,38.73) 49.34,37.46 ; v1(49.34,38.73) 48.92,38.73 ; CAP_SH1.1 39.15,53.61 ; CAP_SH1.1 38.73,53.21 ; CAP_SH1.1 39.57,53.21 ; CAP_SH1.1 39.15,52.82 ; 53.15,42.99 v1(53.15,44.45) ; v1(53.15,44.45) 53.55,44.45 ; v1(53.15,44.45) 53.15,44.83 ; v1(53.15,44.45) 52.77,44.45 ; v1(43.62,3.17) 43.62,3.55 ; v1(43.62,3.17) 43.25,3.17 ; v1(43.62,3.17) 44.4,3.17 ; v1(43.62,3.17) 43.62,2.08 ; v1(49.34,21.59) 49.34,22.34 ; v1(49.34,21.59) 48.59,21.59 ; v1(49.34,21.59) 49.34,20.65 ; v1(49.34,21.59) 50.26,21.59 ; 22.7,3.17 v1(23.3,3.17) ; v1(23.3,3.17) 23.85,3.17 ; v1(23.3,3.17) 23.3,1.91 ; v1(23.3,3.17) 23.3,3.72 ; v1(2.35,12.06) 2.35,12.71 ; v1(2.35,12.06) 3.57,12.06 ; v1(2.35,12.06) 1.88,12.06 ; v1(2.35,12.06) 2.35,11.6 ; 49.03,44.45 v1(49.34,44.45) ; v1(49.34,44.45) 49.34,44.76 ; v1(49.34,44.45) 49.82,44.45 ; v1(49.34,44.45) 49.34,43.06 ; v1(8.7,41.27) 8.7,41.47 ; v1(8.7,41.27) 8.5,41.27 ; v1(8.7,41.27) 8.7,40.74 ; v1(8.7,41.27) 10.03,41.27 ; 38.73,53.18 v1(39.19,53.18) ; v1(39.19,53.18) 39.19,53.61 ; v1(39.19,53.18) 39.19,52.82 ; v1(39.19,53.18) 39.57,53.18 ; 53.15,11.23 v1(53.15,11.43) ; v1(53.15,11.43) 52.95,11.43 ; v1(53.15,11.43) 53.37,11.43 ; v1(53.15,11.43) 53.15,13.08 ; v1(29.65,41.27) 29.65,41.88 ; v1(29.65,41.27) 30.58,41.27 ; v1(29.65,41.27) 29.05,41.27 ; v1(29.65,41.27) 29.65,40.33 ; 49.34,48.67 v1(49.34,50.16) ; v1(49.34,50.16) 49.15,50.16 ; v1(49.34,50.16) 49.71,50.16 ; v1(49.34,50.16) 49.34,50.36 ; 6.16,24.6 v1(6.16,25.4) ; v1(6.16,25.4) 6.16,25.86 ; v1(6.16,25.4) 5.7,25.4 ; v1(6.16,25.4) 7.23,25.4 ; v1(53.15,19.05) 53.52,19.05 ; v1(53.15,19.05) 53.15,20.55 ; v1(53.15,19.05) 53.15,18.71 ; v1(53.15,19.05) 52.8,19.05 ; 14.51,3.17 v1(15.05,3.17) ; v1(15.05,3.17) 15.05,4.5 ; v1(15.05,3.17) 15.23,3.17 ; v1(15.05,3.17) 15.05,2.99 ; v1(53.15,29.21) 53.15,29.89 ; v1(53.15,29.21) 52.47,29.21 ; v1(53.15,29.21) 53.15,28.04 ; v1(53.15,29.21) 53.85,29.21 ; 14.04,5.72 v1(15.05,5.72) ; v1(15.05,5.72) 15.05,6.37 ; v1(15.05,5.72) 15.71,5.72 ; v1(15.05,5.72) 15.05,4.86 ; 49.11,16.51 v1(49.34,16.51) ; v1(49.34,16.51) 49.74,16.51 ; v1(49.34,16.51) 49.34,16.74 ; 33.46,2.9 v1(33.46,3.17) ; v1(33.46,3.17) 33.19,3.17 ; v1(33.46,3.17) 33.46,4.6 ; v1(33.46,3.17) 33.91,3.17 ; 53.15,20.57 v1(53.15,21.59) ; v1(53.15,21.59) 54,21.59 ; v1(53.15,21.59) 53.15,22.41 ; v1(53.15,21.59) 52.32,21.59 ; 1.97,25.4 v1(2.35,25.4) ; v1(2.35,25.4) 2.35,24.68 ; v1(2.35,25.4) 2.35,25.78 ; v1(2.35,25.4) 3.49,25.4 ; v1(41.08,5.72) 41.86,5.72 ; v1(41.08,5.72) 40.19,5.72 ; v1(41.08,5.72) 41.08,4.75 ; v1(41.08,5.72) 41.08,6.49 ; 53.15,46.72 v1(53.15,46.99) ; v1(53.15,46.99) 53.44,46.99 ; v1(53.15,46.99) 53.15,48.57 ; v1(53.15,46.99) 52.88,46.99 ; v1(53.15,8.89) 53.62,8.89 ; v1(53.15,8.89) 53.15,9.34 ; v1(53.15,8.89) 52.7,8.89 ; v1(53.15,8.89) 53.15,7.5 ; v1(2.35,52.07) 2.35,52.69 ; v1(2.35,52.07) 2.35,51.93 ; v1(2.35,52.07) 2.49,52.07 ; 28.38,5.12 v1(28.38,5.72) ; v1(28.38,5.72) 28.38,6.11 ; v1(28.38,5.72) 27.11,5.72 ; v1(28.38,5.72) 28.78,5.72 ; v1(30.92,3.17) 30.92,3.57 ; v1(30.92,3.17) 30.92,2.06 ; v1(30.92,3.17) 30.17,3.17 ; v1(30.92,3.17) 31.32,3.17 ; 53.15,52.33 v1(53.15,53.34) ; v1(53.15,53.34) 52.32,53.34 ; v1(53.15,53.34) 54,53.34 ; v1(53.15,53.34) 53.15,54.17 ; v1(11.87,3.17) 12.64,3.17 ; v1(11.87,3.17) 11.87,2.08 ; v1(11.87,3.17) 11.87,3.55 ; v1(11.87,3.17) 11.5,3.17 ; v1(10.6,41.27) 10.6,41.51 ; v1(10.6,41.27) 10.6,40.7 ; v1(10.6,41.27) 10.37,41.27 ; v1(10.6,41.27) 11.9,41.27 ; 48.62,41.91 v1(49.34,41.91) ; v1(49.34,41.91) 49.34,41.19 ; v1(49.34,41.91) 49.34,42.89 ; v1(49.34,41.91) 50.23,41.91 ; 2.35,32.15 v1(2.35,33.02) ; v1(2.35,33.02) 2.11,33.02 ; v1(2.35,33.02) 3.34,33.02 ; v1(2.35,33.02) 2.35,33.26 ; v1(53.15,55.24) 53.97,55.24 ; v1(53.15,55.24) 52.36,55.24 ; v1(53.15,55.24) 53.15,54.19 ; v1(53.15,55.24) 53.15,56.04 ; v1(36,3.17) 36,3.4 ; v1(36,3.17) 36.93,3.17 ; v1(36,3.17) 36,2.23 ; v1(36,3.17) 35.78,3.17 ; v1(25.84,5.72) 25.84,6.32 ; v1(25.84,5.72) 25.24,5.72 ; v1(25.84,5.72) 26.91,5.72 ; v1(25.84,5.72) 25.84,4.92 ; 49.34,46.8 v1(49.34,46.99) ; v1(49.34,46.99) 49.15,46.99 ; v1(49.34,46.99) 49.71,46.99 ; v1(49.34,46.99) 49.34,48.49 ; v1(49.34,55.24) 49.34,55.96 ; v1(49.34,55.24) 50.23,55.24 ; v1(49.34,55.24) 48.62,55.24 ; v1(49.34,55.24) 49.34,54.27 ; 4.77,9.53 v1(6.16,9.53) ; v1(6.16,9.53) 6.16,9.66 ; v1(6.16,9.53) 6.16,9.05 ; v1(6.16,9.53) 6.29,9.53 ; 2.04,36.19 v1(2.35,36.19) ; v1(2.35,36.19) 2.35,36.99 ; v1(2.35,36.19) 3.42,36.19 ; v1(2.35,36.19) 2.35,35.88 ; 2.35,42.59 v1(2.35,43.18) ; v1(2.35,43.18) 2.52,43.18 ; v1(2.35,43.18) 2.35,43.35 ; v1(25.84,3.17) 26.44,3.17 ; v1(25.84,3.17) 25.84,4.45 ; v1(25.84,3.17) 25.72,3.17 ; v1(25.84,3.17) 25.84,3.05 ; 6.16,27.73 v1(6.16,27.94) ; v1(6.16,27.94) 6.37,27.94 ; v1(6.16,27.94) 6.16,28.34 ; v1(6.16,27.94) 4.69,27.94 ; 38.54,5.29 v1(38.54,5.72) ; v1(38.54,5.72) 38.54,5.94 ; v1(38.54,5.72) 38.32,5.72 ; v1(38.54,5.72) 39.99,5.72 ; 49.34,18.78 v1(49.34,19.05) ; v1(49.34,19.05) 49.34,20.47 ; v1(49.34,19.05) 49.07,19.05 ; v1(49.34,19.05) 49.78,19.05 ; 34.58,5.72 v1(36,5.72) ; v1(36,5.72) 36.25,5.72 ; v1(36,5.72) 36,5.96 ; v1(36,5.72) 36,5.27 ; v1(41.08,3.17) 41.38,3.17 ; v1(41.08,3.17) 40.66,3.17 ; v1(41.08,3.17) 41.08,4.62 ; v1(41.08,3.17) 41.08,2.88 ; 49.34,26.25 v1(49.34,26.67) ; v1(49.34,26.67) 48.92,26.67 ; v1(49.34,26.67) 49.93,26.67 ; v1(49.34,26.67) 49.34,27.94 ; 14.41,40.63 v1(14.41,41.27) ; v1(14.41,41.27) 14.11,41.27 ; v1(14.41,41.27) 15.64,41.27 ; v1(14.41,41.27) 14.41,41.58 ; 38.54,2.21 v1(38.54,3.17) ; v1(38.54,3.17) 38.54,3.42 ; v1(38.54,3.17) 37.65,3.17 ; v1(38.54,3.17) 38.79,3.17 ; 48.96,8.89 v1(49.34,8.89) ; v1(49.34,8.89) 49.89,8.89 ; v1(49.34,8.89) 49.34,7.57 ; v1(49.34,8.89) 49.34,9.27 ; v1(24.57,41.27) 24.98,41.27 ; v1(24.57,41.27) 24.57,40.54 ; v1(24.57,41.27) 23.44,41.27 ; v1(24.57,41.27) 24.57,41.68 ; 52.81,14.61 v1(53.15,14.61) ; v1(53.15,14.61) 53.15,13.1 ; v1(53.15,14.61) 53.15,14.94 ; v1(53.15,14.61) 53.51,14.61 ; v1(49.34,53.34) 50.27,53.34 ; v1(49.34,53.34) 49.34,54.09 ; v1(49.34,53.34) 49.34,52.4 ; v1(49.34,53.34) 48.58,53.34 ; 53,24.13 v1(53.15,24.13) ; v1(53.15,24.13) 53.15,24.28 ; v1(53.15,24.13) 53.33,24.13 ; v1(33.46,5.72) 33.46,6.47 ; v1(33.46,5.72) 34.39,5.72 ; v1(33.46,5.72) 32.71,5.72 ; v1(33.46,5.72) 33.46,4.77 ; 5.88,30.48 v1(6.16,30.48) ; v1(6.16,30.48) 7.05,30.48 ; v1(6.16,30.48) 6.16,30.2 ; v1(6.16,30.48) 6.16,31.46 ; v1(53.15,50.16) 53.44,50.16 ; v1(53.15,50.16) 53.15,50.43 ; v1(53.15,50.16) 53.15,48.59 ; v1(53.15,50.16) 52.88,50.16 ; v1(53.15,41.91) 53.15,42.96 ; v1(53.15,41.91) 53.97,41.91 ; v1(53.15,41.91) 52.36,41.91 ; v1(53.15,41.91) 53.15,41.12 ; 53.15,14.97 v1(53.15,16.51) ; v1(53.15,16.51) 53.15,16.81 ; v1(53.15,16.51) 53.48,16.51 ; v1(53.15,16.51) 52.85,16.51 ; 40.45,40.74 v1(40.45,41.27) ; v1(40.45,41.27) 40.26,41.27 ; v1(40.45,41.27) 41.79,41.27 ; v1(40.45,41.27) 40.45,41.47 ; v1(49.34,14.61) 49.78,14.61 ; v1(49.34,14.61) 49.08,14.61 ; v1(49.34,14.61) 49.34,13.18 ; v1(49.34,14.61) 49.34,14.87 ; v1(6.16,12.06) 6.16,12.78 ; v1(6.16,12.06) 6.16,11.53 ; v1(6.16,12.06) 7.31,12.06 ; v1(6.16,12.06) 5.62,12.06 ; 32.78,41.27 v1(33.46,41.27) ; v1(33.46,41.27) 33.46,40.26 ; v1(33.46,41.27) 33.46,41.96 ; v1(33.46,41.27) 34.32,41.27 ; 53.15,37.38 v1(53.15,38.73) ; v1(53.15,38.73) 53.67,38.73 ; v1(53.15,38.73) 53.15,39.23 ; v1(53.15,38.73) 52.66,38.73 ; 52.66,26.67 v1(53.15,26.67) ; v1(53.15,26.67) 53.15,28.02 ; v1(53.15,26.67) 53.15,26.18 ; v1(53.15,26.67) 53.67,26.67 ; 2.35,27.65 v1(2.35,27.94) ; v1(2.35,27.94) 2.64,27.94 ; v1(2.35,27.94) 2.35,28.41 ; 2.35,30.28 v1(2.35,30.48) ; v1(2.35,30.48) 3.31,30.48 ; v1(2.35,30.48) 2.35,31.39 ; v1(2.35,30.48) 2.15,30.48 ; v1(4.89,54.61) 4.89,55.76 ; v1(4.89,54.61) 4.89,54.47 ; v1(4.89,54.61) 4.17,54.61 ; v1(4.89,54.61) 5.03,54.61 ; v1(2.35,9.53) 2.56,9.53 ; v1(2.35,9.53) 2.35,9.73 ; v1(2.35,9.53) 2.35,8.97
  BOTTOM w0.381: 17.59,3.3 v1(17.59,5.72) ; v1(17.59,5.72) 17.38,5.72 ; v1(17.59,5.72) 17.59,5.93 ; v1(17.59,5.72) 17.93,5.72 ; v1(30.92,3.17) 31.43,3.17 ; v1(30.92,3.17) 30.92,3.79 ; v1(30.92,3.17) 30.92,2.67 ; v1(30.92,3.17) 28.77,3.17 ; 52.3,26.67 v1(53.15,26.67) ; v1(53.15,26.67) 53.15,27.66 ; v1(53.15,26.67) 53.15,25.82 ; v1(53.15,26.67) 54.33,26.67 ; 26.63,41.27 v1(27.11,41.27) ; v1(27.11,41.27) 28.04,41.27 ; v1(27.11,41.27) 27.11,40.79 ; v1(27.11,41.27) 27.11,43.11 ; v1(2.35,9.53) 3.06,9.53 ; v1(2.35,9.53) 1.82,9.53 ; v1(2.35,9.53) 2.35,7.47 ; v1(2.35,9.53) 2.35,10.05 ; 34.3,3.17 v1(36,3.17) ; v1(36,3.17) 36,2.22 ; v1(36,3.17) 36.96,3.17 ; v1(36,3.17) 36,4.24 ; v1(39.19,53.18) 39.62,53.18 ; v1(39.19,53.18) 37.18,53.18 ; v1(39.19,53.18) 39.19,53.6 ; v1(39.19,53.18) R31.2 ; v1(19.49,41.27) v1(17.59,41.27) ; v1(19.49,41.27) 19.49,41.02 ; v1(19.49,41.27) 19.49,42.88 ; v1(19.49,41.27) 19.74,41.27 ; v1(22.03,41.27) 22.51,41.27 ; v1(22.03,41.27) 22.03,40.8 ; v1(22.03,41.27) 21.1,41.27 ; v1(49.34,50.16) 50.76,50.16 ; v1(49.34,50.16) 48.16,50.16 ; v1(49.34,50.16) 49.34,51.51 ; v1(49.34,50.16) 49.34,48.99 ; 42.83,5.72 v1(43.62,5.72) ; v1(43.62,5.72) 43.62,7.07 ; v1(43.62,5.72) 43.62,4.92 ; v1(43.62,5.72) 45.03,5.72 ; 1.47,30.48 v1(2.35,30.48) ; v1(2.35,30.48) 3.42,30.48 ; v1(2.35,30.48) 2.35,32.18 ; v1(2.35,30.48) 2.35,29.6 ; 52.75,35.56 v1(53.15,35.56) ; v1(53.15,35.56) 53.15,35.96 ; v1(53.15,35.56) 53.15,34.12 ; v1(53.15,35.56) 54.33,35.56 ; 24.57,40.57 v1(24.57,41.27) ; v1(24.57,41.27) 25.28,41.27 ; v1(24.57,41.27) 23.86,41.27 ; v1(6.16,19.05) 6.16,19.39 ; v1(6.16,19.05) 5.82,19.05 ; v1(6.16,19.05) 7.36,19.05 ; v1(6.16,19.05) v1(6.16,17.14) ; 20.76,2.88 v1(20.76,3.17) ; v1(20.76,3.17) 23.18,3.17 ; v1(20.76,3.17) 20.47,3.17 ; v1(20.76,3.17) 20.76,3.57 ; v1(28.38,3.17) 28.38,3.56 ; v1(28.38,3.17) 28.67,3.17 ; v1(28.38,3.17) 28.38,2.89 ; v1(28.38,3.17) 25.97,3.17 ; 43.62,2.15 v1(43.62,3.17) ; v1(43.62,3.17) 45.26,3.17 ; v1(43.62,3.17) 43.62,4.3 ; v1(43.62,3.17) 42.6,3.17 ; v1(2.35,38.73) 3.38,38.73 ; v1(2.35,38.73) 2.35,37.89 ; v1(2.35,38.73) 1.51,38.73 ; v1(2.35,38.73) 2.35,40.48 ; 10.6,40.7 v1(10.6,41.27) ; v1(10.6,41.27) 10.03,41.27 ; v1(10.6,41.27) 10.6,43.2 ; v1(10.6,41.27) 11.45,41.27 ; v1(53.15,29.21) 54.33,29.21 ; v1(53.15,29.21) 53.15,28.58 ; v1(53.15,29.21) 52.52,29.21 ; v1(53.15,29.21) 53.15,30.43 ; 49.08,21.59 v1(49.34,21.59) ; v1(49.34,21.59) 49.85,21.59 ; v1(49.34,21.59) 49.34,23.85 ; v1(49.34,21.59) 49.34,21.33 ; v1(49.34,29.21) 49.34,29.38 ; v1(49.34,29.21) 49.34,26.8 ; v1(49.34,29.21) 49.76,29.21 ; v1(49.34,29.21) 49.17,29.21 ; v1(53.15,11.43) 53.52,11.43 ; v1(53.15,11.43) 53.15,11.99 ; v1(53.15,11.43) 50.94,11.43 ; v1(53.15,11.43) 53.15,11.06 ; v1(49.34,41.91) 50.8,41.91 ; v1(49.34,41.91) 48.12,41.91 ; v1(49.34,41.91) 49.34,40.69 ; v1(49.34,41.91) 49.34,43.21 ; v1(2.35,52.07) 2.88,52.07 ; v1(2.35,52.07) 2.35,51.72 ; v1(2.35,52.07) 2.35,54.3 ; v1(2.35,52.07) 2,52.07 ; 49.34,35.16 v1(49.34,35.56) ; v1(49.34,35.56) 48.94,35.56 ; v1(49.34,35.56) 49.34,37.68 ; v1(49.34,35.56) 49.99,35.56 ; v1(29.65,41.27) 29.65,42.89 ; v1(29.65,41.27) 29.65,41.01 ; v1(29.65,41.27) 29.39,41.27 ; v1(29.65,41.27) 30.81,41.27 ; v1(38.54,3.17) 39.73,3.17 ; v1(38.54,3.17) 37.07,3.17 ; v1(38.54,3.17) 38.54,4.47 ; v1(38.54,3.17) 38.54,1.99 ; 1.6,12.06 v1(2.35,12.06) ; v1(2.35,12.06) 3.29,12.06 ; v1(2.35,12.06) 2.35,12.82 ; v1(2.35,12.06) 2.35,10.24 ; v1(49.34,55.24) 49.34,56.55 ; v1(49.34,55.24) 50.31,55.24 ; v1(49.34,55.24) 48.62,55.24 ; v1(49.34,55.24) 49.34,54.52 ; 16.98,41.27 v1(17.59,41.27) ; v1(17.59,41.27) 17.59,41.89 ; v1(17.59,41.27) 17.59,39.25 ; 49.34,46.22 v1(49.34,46.99) ; v1(49.34,46.99) 48.57,46.99 ; v1(49.34,46.99) 50.35,46.99 ; v1(49.34,46.99) 49.34,48.74 ; 4.01,27.94 v1(6.16,27.94) ; v1(6.16,27.94) 6.41,27.94 ; v1(6.16,27.94) 6.16,27.69 ; v1(6.16,27.94) 6.16,28.55 ; 53.15,49.79 v1(53.15,50.16) ; v1(53.15,50.16) 53.15,50.71 ; v1(53.15,50.16) 53.53,50.16 ; v1(53.15,50.16) 50.93,50.16 ; 6.16,16.63 v1(6.16,17.14) ; v1(6.16,17.14) 3.91,17.14 ; v1(6.16,17.14) 6.5,17.14 ; v1(49.34,19.05) 50.07,19.05 ; v1(49.34,19.05) 49.34,18.56 ; v1(49.34,19.05) 48.85,19.05 ; 1.83,19.05 v1(2.35,19.05) ; v1(2.35,19.05) 2.35,18.53 ; v1(2.35,19.05) 2.35,21.11 ; v1(2.35,19.05) 3.05,19.05 ; v1(2.35,22.22) 3.46,22.22 ; v1(2.35,22.22) 2.35,21.3 ; v1(2.35,22.22) 2.35,23.88 ; v1(49.34,14.61) 50.53,14.61 ; v1(49.34,14.61) 49.34,13.03 ; v1(49.34,14.61) 49.34,15.55 ; v1(49.34,14.61) 48.39,14.61 ; 53.15,41.49 v1(53.15,41.91) ; v1(53.15,41.91) 50.89,41.91 ; v1(53.15,41.91) 53.57,41.91 ; v1(53.15,41.91) 53.15,42.41 ; v1(36.64,41.27) 37.69,41.27 ; v1(36.64,41.27) 36.34,41.27 ; v1(36.64,41.27) 36.64,41.57 ; v1(36.64,41.27) 36.64,39.56 ; 38.37,51.46 R31.2 ; R31.2 40.01,51.46 ; R31.2 39.19,50.64 ; v1(2.35,46.35) 2.7,46.35 ; v1(2.35,46.35) 2.35,48.77 ; v1(2.35,46.35) 2.35,46.19 ; v1(2.35,46.35) 2.19,46.35 ; v1(53.15,53.34) 53.15,53.48 ; v1(53.15,53.34) 51.17,53.34 ; v1(53.15,53.34) 53.29,53.34 ; v1(53.15,53.34) 53.15,52.55 ; 33.46,5.21 v1(33.46,5.72) ; v1(33.46,5.72) 33.46,6.78 ; v1(33.46,5.72) 31.76,5.72 ; v1(33.46,5.72) 33.97,5.72 ; v1(30.92,5.72) 31.21,5.72 ; v1(30.92,5.72) 29,5.72 ; v1(30.92,5.72) 30.92,6.55 ; v1(30.92,5.72) 30.92,5.43 ; 48.41,53.34 v1(49.34,53.34) ; v1(49.34,53.34) 49.34,51.76 ; v1(49.34,53.34) 50.52,53.34 ; v1(49.34,53.34) 49.34,54.27 ; 41.08,4.69 v1(41.08,5.72) ; v1(41.08,5.72) 42.27,5.72 ; v1(41.08,5.72) 40.06,5.72 ; v1(41.08,5.72) 41.08,7.3 ; v1(14.41,41.27) 15.56,41.27 ; v1(14.41,41.27) 14.41,39.66 ; v1(14.41,41.27) 14.41,41.48 ; v1(14.41,41.27) 14.21,41.27 ; v1(49.34,44.45) 50.58,44.45 ; v1(49.34,44.45) 49.34,43.46 ; v1(49.34,44.45) 48.35,44.45 ; v1(49.34,44.45) 49.34,45.98 ; 37.3,5.72 v1(38.54,5.72) ; v1(38.54,5.72) 38.54,7.23 ; v1(38.54,5.72) 39.5,5.72 ; v1(38.54,5.72) 38.54,4.76 ; v1(49.34,16.51) 50.3,16.51 ; v1(49.34,16.51) 49.34,15.8 ; v1(49.34,16.51) 49.34,18.32 ; v1(49.34,16.51) 48.63,16.51 ; 25.67,5.72 v1(25.84,5.72) ; v1(25.84,5.72) 25.84,5.89 ; v1(25.84,5.72) 25.84,3.3 ; v1(25.84,5.72) 26.23,5.72 ; 49.34,7.5 v1(49.34,8.89) ; v1(49.34,8.89) 48.21,8.89 ; v1(49.34,8.89) 50.72,8.89 ; v1(49.34,8.89) 49.34,10.02 ; 52.61,21.59 v1(53.15,21.59) ; v1(53.15,21.59) 53.15,22.13 ; v1(53.15,21.59) 53.15,20.29 ; v1(53.15,21.59) 54.33,21.59 ; v1(11.87,3.17) 11.87,3.48 ; v1(11.87,3.17) 12.07,3.17 ; v1(11.87,3.17) 11.87,2.98 ; 51.11,44.45 v1(53.15,44.45) ; v1(53.15,44.45) 53.34,44.45 ; v1(53.15,44.45) 53.15,45.18 ; v1(53.15,44.45) 53.15,44.25 ; 2.35,26.83 v1(2.35,27.94) ; v1(2.35,27.94) 3.64,27.94 ; v1(2.35,27.94) 2.35,29.41 ; v1(2.35,14.61) 3.51,14.61 ; v1(2.35,14.61) 2.35,15.58 ; v1(2.35,14.61) 2.35,13 ; 36,4.98 v1(36,5.72) ; v1(36,5.72) 36,7.01 ; v1(36,5.72) 34.53,5.72 ; v1(36,5.72) 36.74,5.72 ; v1(53.15,24.13) 53.15,24.89 ; v1(53.15,24.13) 53.15,23.05 ; v1(53.15,24.13) 52.39,24.13 ; v1(53.15,24.13) 54.33,24.13 ; v1(2.35,36.19) 2.35,37.71 ; v1(2.35,36.19) 3.6,36.19 ; v1(2.35,36.19) 2.35,35.13 ; 48.53,38.73 v1(49.34,38.73) ; v1(49.34,38.73) 49.34,40.44 ; v1(49.34,38.73) 50.4,38.73 ; v1(49.34,38.73) 49.34,37.93 ; 22.91,5.72 v1(23.3,5.72) ; v1(23.3,5.72) 23.3,5.88 ; v1(23.3,5.72) 23.47,5.72 ; v1(23.3,5.72) 23.3,3.3 ; v1(2.35,33.02) 2.35,34.94 ; v1(2.35,33.02) 2.35,32.36 ; v1(2.35,33.02) 3.19,33.02 ; v1(2.35,33.02) 1.69,33.02 ; 2.35,15.77 v1(2.35,17.14) ; v1(2.35,17.14) 2.35,18.35 ; v1(2.35,17.14) 3.74,17.14 ; v1(6.16,9.53) 7.36,9.53 ; v1(6.16,9.53) 6.16,9.19 ; v1(6.16,9.53) 6.16,11.09 ; v1(6.16,9.53) 5.83,9.53 ; 2.35,24.07 v1(2.35,25.4) ; v1(2.35,25.4) 2.35,26.65 ; v1(2.35,25.4) 3.78,25.4 ; 53.15,8.3 v1(53.15,8.89) ; v1(53.15,8.89) 53.15,9.22 ; v1(53.15,8.89) 50.98,8.89 ; v1(53.15,8.89) 53.48,8.89 ; v1(6.16,25.4) 6.55,25.4 ; v1(6.16,25.4) 6.16,25.79 ; v1(6.16,25.4) 6.16,24.92 ; 53.15,17.52 v1(53.15,19.05) ; v1(53.15,19.05) 53.15,19.36 ; v1(53.15,19.05) 52.84,19.05 ; v1(53.15,19.05) 54.33,19.05 ; 43.22,41.27 v1(43.62,41.27) ; v1(43.62,41.27) 43.62,43.03 ; v1(43.62,41.27) 43.62,40.87 ; v1(43.62,41.27) 44.64,41.27 ; 48.18,11.43 v1(49.34,11.43) ; v1(49.34,11.43) 50.75,11.43 ; v1(49.34,11.43) 49.34,10.27 ; v1(49.34,11.43) 49.34,12.79 ; v1(41.08,3.17) 42.49,3.17 ; v1(41.08,3.17) 41.08,1.93 ; v1(41.08,3.17) 41.08,4.53 ; v1(41.08,3.17) 39.84,3.17 ; 52.75,31.75 v1(53.15,31.75) ; v1(53.15,31.75) 53.15,31.35 ; v1(53.15,31.75) 54.33,31.75 ; v1(53.15,31.75) 53.15,33.19 ; 51.16,14.61 v1(53.15,14.61) ; v1(53.15,14.61) 53.3,14.61 ; v1(53.15,14.61) 53.15,13.83 ; v1(53.15,14.61) 53.15,14.75 ; 33.46,2.44 v1(33.46,3.17) ; v1(33.46,3.17) 34.2,3.17 ; v1(33.46,3.17) 33.46,4.01 ; v1(33.46,3.17) 31.54,3.17
  vias: v1(2.35,48.89) v1(2.35,40.64) v1(2.45,54.46) v1(4.89,52.07) v1(6.16,22.22) v1(6.16,14.61) v1(11.87,5.72) v1(49.34,24.13)
I2C_SCL: length 67.6
  TOP w0.178: v1(29.55,115.24) 29.65,115.14 33.36,115.14 33.62,115.39 33.99,115.39 34.55,115.39 34.55,115.39 41.24,115.39 42.18,114.45 v1(42.18,113.87)
  BOTTOM w0.178: v1(42.18,113.87) 44.72,113.87 52.13,106.45 52.13,80.92 50.33,79.12 43.01,79.12 42.1,78.21 R41.2 ; R13.2 29.35,115.44 v1(29.55,115.24) 29.55,114.94 30.45,114.04 U1.38
I2C_SDA: length 43.9
  TOP w0.178: v1(23.56,78.49) 22.69,79.35 22.69,82.53 22.62,82.6 22.62,97.54 25.13,100.05 25.13,101.09 25.97,101.93 25.97,105.45 28.74,108.22 28.74,112.6 v1(30.7,114.55)
  BOTTOM w0.178: U1.39 30.85,114.4 v1(30.7,114.55) 30.62,114.63 R12.2
  BOTTOM w0.203: R40.2 v1(23.56,78.49)
KP_DM: length 24.3
  TOP w0.127: v1(10.51,105.58) 10.25,105.84 10.07,105.84 9.94,105.71 9.94,105.08 10.07,104.95 13.7,104.95 15.33,106.58 21.74,106.58 v1(22,106.84)
  BOTTOM w0.127: U2.1 11.72,105.84 10.77,105.84 v1(10.51,105.58) 10.24,105.85 5.12,105.85 4.92,105.65 J2.2 ; v1(22,106.84) 22.26,106.58 23.25,106.58 R11.1
KP_DP: length 25.2
  TOP w0.127: v1(10.51,106.36) 10.25,106.1 9.97,106.1 9.69,105.82 9.69,104.97 9.97,104.7 13.8,104.7 15.43,106.32 21.74,106.32 v1(22,106.06)
  BOTTOM w0.127: J2.3 4.92,106.3 5.12,106.1 10.25,106.1 v1(10.51,106.36) 10.77,106.1 11.68,106.1 U2.2 ; v1(22,106.06) 22.26,106.32 23.25,106.32 R10.1
P0_4: length 44.6
  TOP w0.178: v1(34.99,87.05) 34.99,86.8 34.02,85.83 34.02,76.81 28.64,71.42 v1(17.59,71.42)
  BOTTOM w0.254: v1(17.59,71.42) 17.59,61.95 15.73,60.09 U7.101 ; R48.1 v1(34.99,87.05)
P5_0: length 2.6
  BOTTOM w0.254: 36.39,75.55 36.47,75.47 U7.32
P5_1: length 2.6
  BOTTOM w0.254: U7.13 19.34,74.35 19.24,74.44 R35.1
P5LP1_2: length 45.1
  TOP w0.178: v1(21.78,116.2) 21.93,116.05 21.93,108.97 22.54,108.36 22.54,105.87 18.48,101.81 18.48,99.57 19.11,98.93 22.31,98.93 v1(22.66,99.28)
  BOTTOM w0.178: U1.13 30.85,103.91 30.97,103.79 30.97,101.26 30.19,100.48 30.19,99.62 29.69,99.12 22.81,99.12 v1(22.66,99.28)
  BOTTOM w0.254: SW2.2 SW2.1 21.78,118.48 v1(21.78,116.2)
P5LP1_4: length 26.4
  L03_SIG w0.178: v1(23.18,100.2) 23.18,104.65 v1(23.05,104.78)
  BOTTOM w0.178: v1(23.05,104.78) 22.67,105.16 21.53,105.16 21.09,105.59 21.09,107.19 20.92,107.37 18.17,107.37 17.57,107.97 R9.1 ; v1(23.18,100.2) 23.95,99.43 29.54,99.43 29.83,99.72 29.83,100.61 30.66,101.44 30.66,103.67 30.05,104.28 U1.15
P5LP_SIO_VREF: length 5
  BOTTOM w0.178: U1.48 34.45,113.9 34.57,114.02
  BOTTOM w0.381: 34.57,114.02 34.61,114.06 34.98,114.06 35.83,114.9 R6.2
  BOTTOM w0.508: R6.2 R5.2
P5LP_VCCD: length 20.3
  L03_SIG w0.762: v1(38.14,111.79) 37.33,112.6 29.93,112.6 27.98,110.64 v1(26.32,110.64)
  BOTTOM w0.178: U1.26 27.75,109.22 27.47,109.5 ; U1.57 37.18,110.42 37.43,110.67
  BOTTOM w0.254: 27.47,109.5 27.19,109.78 C15.1
  BOTTOM w0.381: v1(38.14,111.79) C14.1 39.02,111.56 38.66,111.19 37.95,111.19 37.43,110.67
  BOTTOM w0.508: C15.1 v1(26.32,110.64)
P5LP_VDD: length 40
  BOTTOM w0.178: 28.49,114.1 29.02,114.1 29.25,113.87 U1.35 ; 32.98,114.17 32.85,114.04 U1.44 ; 37.32,106.42 U1.67 ; 37.4,109.62 U1.59 ; U1.24 27.41,108.42 27.37,108.46
  BOTTOM w0.203: 29.25,104.42 U1.17 ; U1.52 37.25,112.42 37.63,112.8
  BOTTOM w0.254: 27.37,108.46 C5.1
  BOTTOM w0.305: C3.1 v1(23.91,109.22)
  BOTTOM w0.381: C6.1 C8.1 33.16,114.35 32.98,114.17 ; 37.4,109.62 37.77,109.25 C21.1 C18.1 ; 28.49,114.1 27.75,114.83 C7.1 C9.1 ; C19.1 37.37,106.47 37.32,106.42 ; R2.1 39.05,114.33 C20.1 39.02,114.3 C16.1 38.11,113.06 37.86,112.8 37.63,112.8 ; C5.1 26.32,108.18 25.94,107.8 25.93,107.8 v1(25.9,107.76) ; 29.25,104.42 28.82,103.99 C10.1 ; C17.1 v1(38.36,104.29)
  BOTTOM w0.508: C18.1 v1(38.29,110.52) ; C9.1 v1(26.48,115.19) ; v1(38.96,117.03) 39.05,116.93 R2.1 ; C17.1 C19.1 ; v1(34.22,114.95) 34.22,114.99 34.43,115.21 C6.1 ; C4.1 C10.1 v1(27.55,102.87) 26.53,102.87 25.95,102.29 v1(25.95,100.15)
